# Altium PCB Leningrad_orig.PcbDoc (part 1 of 3)
Units mil, origin at the board's own origin, x right, y up, seen from the top; angles counter-clockwise.
Board outline 8070.87 x 4724.41 mil, 2 copper layers (Top Layer, Bottom Layer); 124 components, 165 nets, 1259 pads, 367 vias.
Unrouted connection lines stored in the file: 15.
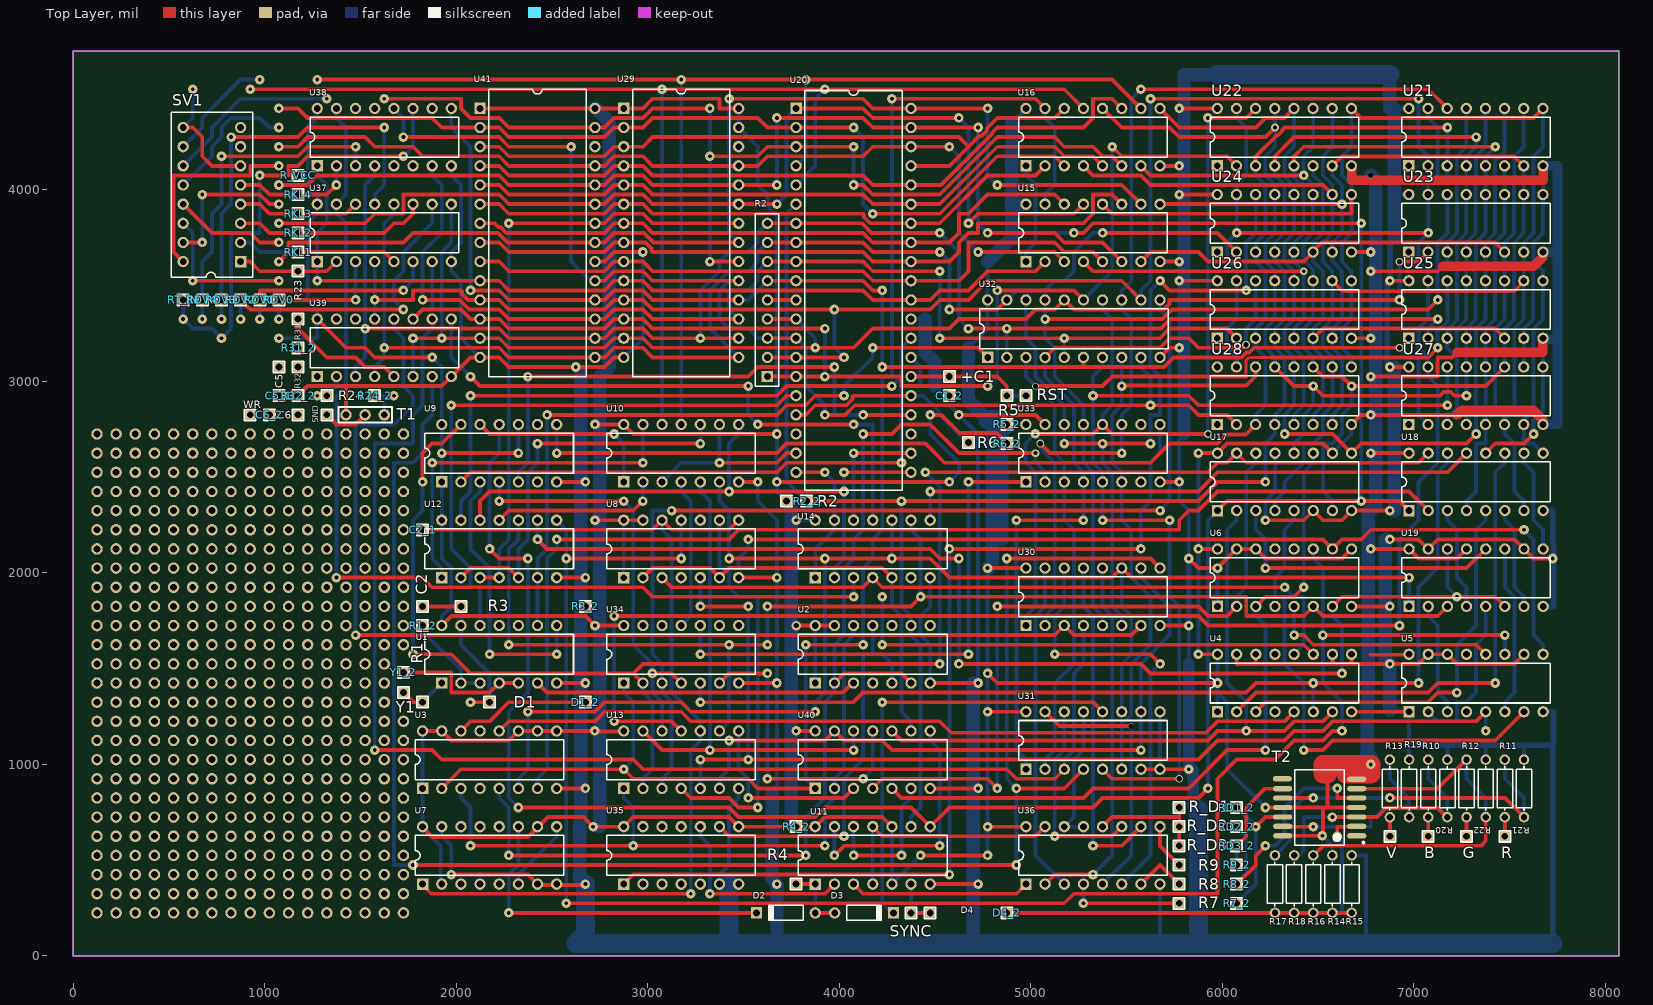
[diagram p0: Top Layer view]
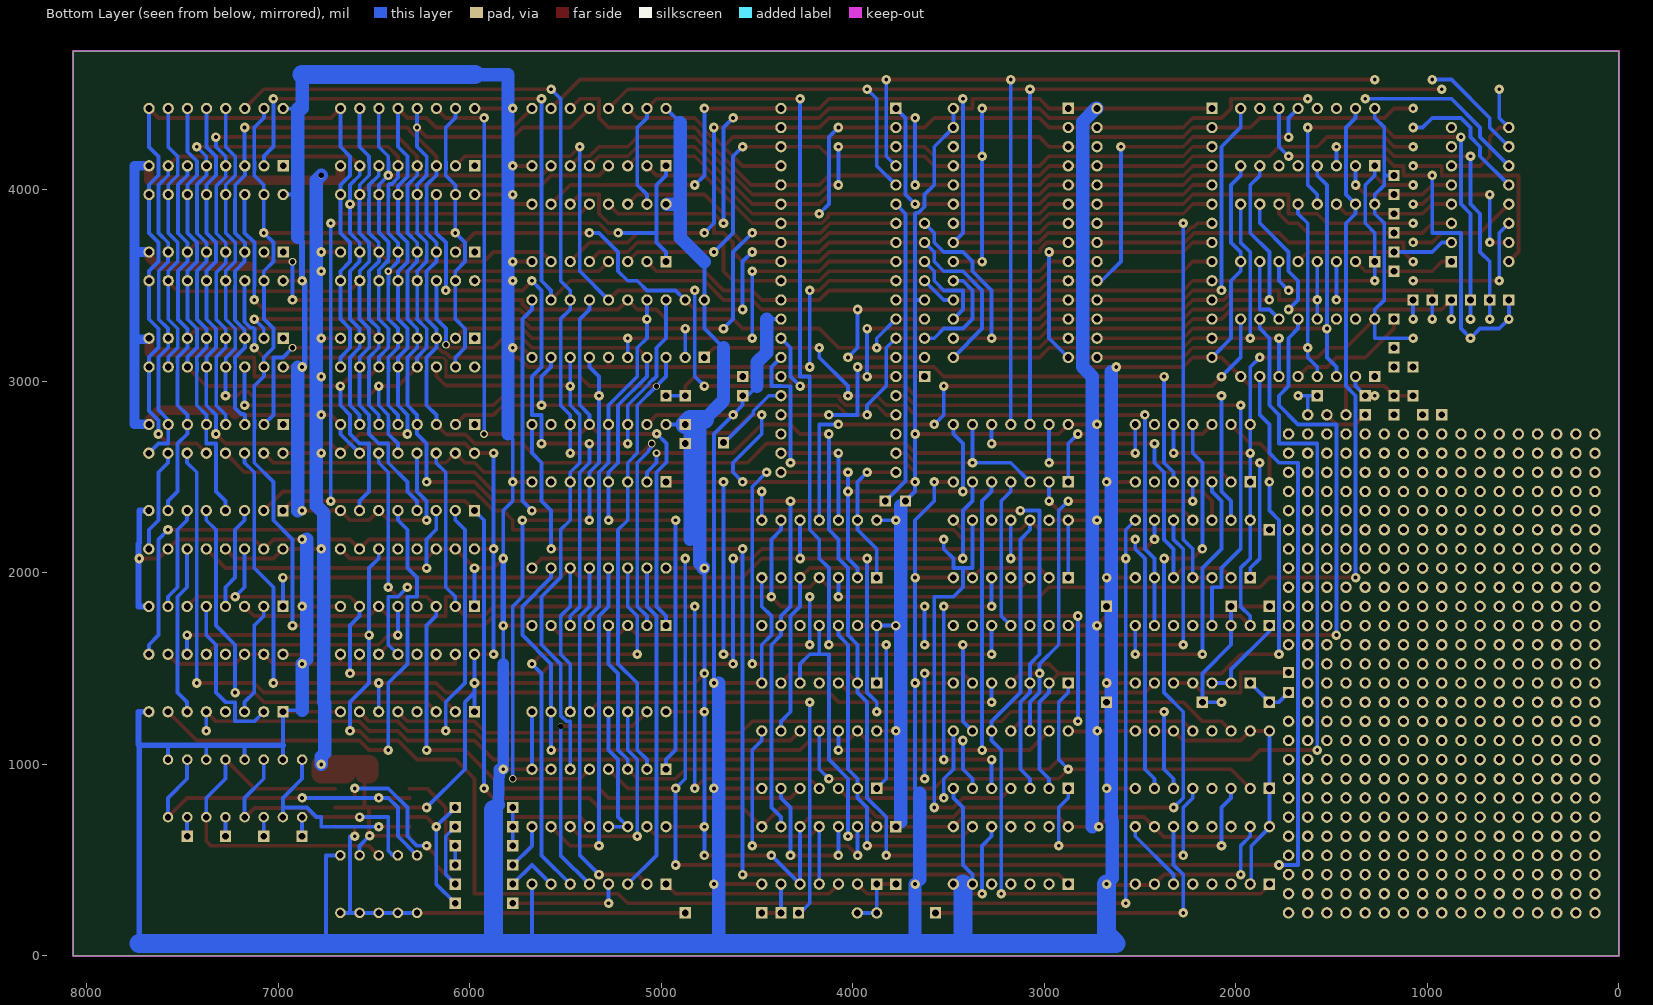
[diagram p1: Bottom Layer view, seen from below]

## Layer stack, top to bottom
Top Solder: solder mask 0.4, Solder Resist, Dk 3.5
Top Layer: signal copper 1.4
Dielectric 1: dielectric 12.6, FR-4, Dk 4.8
Bottom Layer: signal copper 1.4
Bottom Solder: solder mask 0.4, Solder Resist, Dk 3.5

## Board outline
0,0 8070.87,0 8070.87,4724.41 0,4724.41

## Design rules (kind name [scope] priority, off if disabled: settings)
Clearance [All] p1: gap=10 ignorepadtopadclearanceinfootprint=FALSE except(0: Arc-Hole Track-Hole SMDPad-Hole THPad-Hole Via-Hole Fill-Hole Poly-Hole Region-Hole Text-Hole)
PolygonConnect [All] p1: connectstyle=Relief reliefconductorwidth=10 reliefentries=4 polygonreliefangle="90 Angle" airgapwidth=10
RoutingVias [All] p1: holewidth=20 width=50 viastyle="Through Hole" minholewidth=20 minwidth=50 maxholewidth=20 maxwidth=50
SolderMaskExpansion [All] p1: expansion=4
Width Power_GND [InNet('GND')] p1: maxlimit=100 minlimit=20 preferedwidth=70 minimp=50.000000 maximp=50.000000 favimp=50.000000
Width Power_VCC [InNet('VCC')] p2: maxlimit=100 minlimit=20 preferedwidth=70 minimp=50.000000 maximp=50.000000 favimp=50.000000
Width Power_VDD [InNet('VDD')] p3: maxlimit=100 minlimit=20 preferedwidth=70 minimp=50.000000 maximp=50.000000 favimp=50.000000
Width [All] p4: maxlimit=20 minlimit=20 preferedwidth=20 minimp=50.000000 maximp=50.000000 favimp=50.000000
30 further rules are at their usual default settings.

## Components (designator, comment, footprint, x,y, rotation, side; value= is the part's Value field where it differs from the comment)
+C1 "" PIN1 4575,3025 r0 top locked (schematic designator C1_1)
B "" PIN1 7075,625 r90 top locked
C1_2 "" PIN1 4575,2925 r0 top locked
C2 "" PIN1 1825,1825 r0 top locked (schematic designator C2_2)
C2_1 "" PIN1 1825,2225 r0 top
C5 "" PIN1 1075,3075 r0 top locked (schematic designator C5_2)
C5_1 "" PIN1 1075,2925 r0 top locked
C6 "" PIN1 1175,2825 r0 top locked (schematic designator C6_1)
C6_2 "" PIN1 1025,2825 r0 top locked
D1 "" PIN1 2175,1325 r90 top locked (schematic designator D1_1)
D1_2 "" PIN1 2675,1325 r0 top locked
D2 "" DO-35A 3721.46,225 r180 top
D3 "" DO-35A 4130,225 r0 top
D4 "Socket" PIN1 4475,225 r180 top locked (schematic designator D4_1)
D4_2 "Socket" PIN1 4875,225 r90 top locked
G "" PIN1 7275,625 r90 top locked
R "" PIN1 7475,625 r90 top locked
R1 "" PIN1 1825,1325 r0 top (schematic designator R1_1)
R1_2 "" PIN1 1825,1725 r0 top
R2 "Res Pack8" LINE9 3625,3025 r180 top locked value=15K
R2 "" PIN1 3725,2375 r0 top locked (schematic designator R2_1)
R2_2 "" PIN1 3830,2375 r0 top locked
R3 "" PIN1 2025,1825 r0 top locked (schematic designator R3_1)
R3_2 "" PIN1 2675,1825 r0 top locked
R4 "" PIN1 3775,375 r0 top (schematic designator R4_1)
R4_2 "" PIN1 3775,675 r0 top
R5 "" PIN1 4875,2925 r0 top locked (schematic designator R5_1)
R5_2 "" PIN1 4875,2775 r0 top locked
R6 "" PIN1 4675,2680 r0 top locked (schematic designator R6_1)
R6_2 "" PIN1 4875,2675 r0 top locked
R7 "" PIN1 5775,275 r0 top locked (schematic designator R7_1)
R7_2 "" PIN1 6075,275 r0 top locked
R8 "" PIN1 5775,375 r0 top locked (schematic designator R8_1)
R8_2 "" PIN1 6075,375 r0 top locked
R9 "" PIN1 5775,475 r0 top locked (schematic designator R9_1)
R9_2 "" PIN1 6075,475 r0 top locked
R10 "" MLT 7075,875 r270 top locked value=75
R11 "" MLT 7475,875 r270 top locked value=75
R12 "" MLT 7275,875 r270 top locked value=75
R13 "" MLT 6875,875 r270 top locked value=75
R14 "" MLT 6575,375 r90 top locked value=750
R15 "" MLT 6675,375 r270 top locked value=1K
R16 "" MLT 6475,375 r270 top locked value=430
R17 "" MLT 6275,375 r270 top locked value=1K
R18 "" MLT 6375,375 r270 top locked value=2K
R19 "" MLT 6975,875 r270 top locked value=200
R20 "" MLT 7175,875 r270 top locked value=200
R21 "" MLT 7575,875 r270 top locked value=200
R22 "" MLT 7375,875 r270 top locked value=200
R23 "" PIN1 1175,3575 r0 top locked (schematic designator RKL0)
R24 "" PIN1 1325,2925 r90 top locked (schematic designator R24_1)
R24_2 "" PIN1 1575,2925 r90 top locked
R31 "" PIN1 1175,3325 r90 top locked (schematic designator R31_1)
R31_2 "" PIN1 1175,3175 r90 top locked
R32 "" PIN1 1175,3075 r90 top locked (schematic designator R32_1)
R32_2 "" PIN1 1175,2925 r90 top locked
R_D1 "" PIN1 5775,775 r90 top locked (schematic designator RD1_1)
R_D2 "" PIN1 5775,675 r90 top locked (schematic designator RD2_1)
R_D3 "" PIN1 5775,575 r90 top locked (schematic designator RD3_1)
R_VCC "" PIN1 1175,4075 r90 top locked
RD1_2 "" PIN1 6075,775 r90 top locked
RD2_2 "" PIN1 6075,675 r90 top locked
RD3_2 "" PIN1 6075,575 r90 top locked
RDV0 "" PIN1 1075,3425 r0 top locked
RDV1 "" PIN1 975,3425 r0 top locked
RDV2 "" PIN1 875,3425 r0 top locked
RDV3 "" PIN1 775,3425 r0 top locked
RDV4 "" PIN1 675,3425 r0 top locked
RKL1 "" PIN1 1175,3675 r0 top locked
RKL2 "" PIN1 1175,3775 r0 top locked
RKL3 "" PIN1 1175,3875 r0 top locked
RKL4 "" PIN1 1175,3975 r0 top locked
RST "" PIN1 4975,2925 r90 top locked (schematic designator RESET_BTN)
RT_IN "Socket" PIN1 575,3425 r90 top locked
SND "" PIN1 1325,2825 r0 top locked
SV1 "" DIP-16-KEY 875,3625 r90 top locked
SYNC "" PIN1 4375,225 r0 top locked
T1 "KT315" D35 1525,2825 r0 top locked
T2 "1HT251" CFP125P1450X730-14N 6508.35,775 r180 top locked
U1 "" N014 2225,1575 r0 top locked
U2 "" N014 4175,1575 r0 top locked
U3 "" N016 2175,1025 r0 top locked
U4 "" N016 6325,1425 r0 top locked
U5 "" N016 7325,1425 r0 top locked
U6 "" N016 6325,1975 r0 top locked
U7 "" 648-08 2175,525 r0 top locked
U8 "" N014 3175,2125 r0 top locked
U9 "" N014 2225,2625 r0 top locked
U10 "" N014 3175,2625 r0 top locked
U11 "" N014 4175,525 r0 top locked
U12 "" N014 2225,2125 r0 top locked
U13 "" N014 3175,1025 r0 top locked
U14 "" N014 4175,2125 r0 top locked
U15 "" N016 5325,3775 r0 top locked
U16 "" N016 5325,4275 r0 top locked
U17 "" N016 6325,2475 r0 top locked
U18 "" N016 7325,2475 r0 top locked
U19 "" N016 7325,1975 r0 top locked
U20 "" PDIP40 4075,3475 r270 top locked
U21 "MN41256A-08" DIP16 6975,4125 r90 top locked
U22 "MN41256A-08" DIP16 5975,4125 r90 top locked
U23 "MN41256A-08" DIP16 6975,3675 r90 top locked
U24 "MN41256A-08" DIP16 5975,3675 r90 top locked
U25 "MN41256A-08" DIP16 6975,3225 r90 top locked
U26 "MN41256A-08" DIP16 5975,3225 r90 top locked
U27 "MN41256A-08" DIP16 6975,2775 r90 top locked
U28 "MN41256A-08" DIP16 5975,2775 r90 top locked
U29 "" FDIP28W 3175,3775 r270 top locked
U30 "" N016D 5325,1875 r0 top locked
U31 "" N016D 5325,1125 r0 top locked
U32 "" N020 5225,3275 r0 top locked
U33 "" N016 5325,2625 r0 top locked
U34 "" N014 3175,1575 r0 top locked
U35 "" N014 3175,525 r0 top locked
U36 "" N016 5325,525 r0 top locked
U37 "" N016 1625,3775 r0 top locked
U38 "" N016 1625,4275 r0 top locked
U39 "" N016 1625,3175 r0 top locked
U40 "" N014 4175,1025 r0 top locked
U41 "" FDIP28W 2425,3775 r270 top locked
V "" PIN1 6875,625 r90 top locked (schematic designator VIDEO)
WR "" PIN1 925,2825 r0 top locked
Y1 "Socket" PIN1 1725,1375 r90 top (schematic designator Y1_1)
Y1_2 "Socket" PIN1 1725,1480 r90 top

## Footprints (in the part's own frame and the unit in brackets; to place one, negate y for a bottom-side part, rotate by r counter-clockwise, add the part's x,y. Pads: shape width x height; smd on the part's side, far side on the other; paste and mask are expansions set on the pad)
648-08 [mm] "DIP; 16 Leads; Row Spacing 7.62 mm; Pitch 2.54 mm"
  rect 1.5x1.5 hole 0.9: 1(-8.89,-3.81)
  round 1.5 hole 0.9: 2(-6.35,-3.81) 3(-3.81,-3.81) 4(-1.27,-3.81) 5(1.27,-3.81) 6(3.81,-3.81) 7(6.35,-3.81) 8(8.89,-3.81) 9(8.89,3.81) 10(6.35,3.81) 11(3.81,3.81) 12(1.27,3.81) 13(-1.27,3.81) 14(-3.81,3.81) 15(-6.35,3.81) 16(-8.89,3.81)
  silkscreen extent -9.85,-2.65 9.85,2.65
CFP125P1450X730-14N [mm] "CFP, 14-Leads, Body 10,00x6,50mm (max), Pitch 1,25mm, IPC Medium Density"
  oval 2.54x0.7 smd: 1(-4.911,3.75) 2(-4.911,2.5) 3(-4.911,1.25) 4(-4.911,0) 5(-4.911,-1.25) 6(-4.911,-2.5) 7(-4.911,-3.75) 8(4.953,-3.81) 9(4.911,-2.5) 10(4.911,-1.25) 11(4.911,0) 12(4.911,1.25) 13(4.911,2.5) 14(4.911,3.75)
  silkscreen extent -5.93,-5 3.27,5, body extent -3.25,-5 3.25,5, height 2.3
D35 [mil]
  round 60 hole 35.43: 1(-100,0) 2(0,0) 3(100,0)
  silkscreen extent -140,-40 140,40
DIP16 [mm]
  rect 1.5x1.5 hole 0.9: 1(0,0.03)
  round 1.5 hole 0.9: 2(0,-2.51) 3(0,-5.05) 4(0,-7.59) 5(0,-10.13) 6(0,-12.67) 7(0,-15.21) 8(0,-17.75) 9(7.62,-17.75) 10(7.62,-15.21) 11(7.62,-12.67) 12(7.62,-10.13) 13(7.62,-7.59) 14(7.62,-5.05) 15(7.62,-2.51) 16(7.62,0.03)
  silkscreen extent 1.16,-18.71 6.46,0.99
DIP-16-KEY [mm] "DIP; 16 Leads; Row Spacing 7.62 mm; Pitch 2.54 mm"
  rect 1.5x1.5 hole 0.9: 1(0,0)
  round 1.5 hole 0.9: 2(2.54,0) 3(5.08,0) 4(7.62,0) 5(10.16,0) 6(12.7,0) 7(15.24,0) 8(17.78,0) 9(17.78,7.62) 10(15.24,7.62) 11(12.7,7.62) 12(10.16,7.62) 13(7.62,7.62) 14(5.08,7.62) 15(2.54,7.62) 16(0,7.62)
  silkscreen extent -2.05,-1.59 19.83,9.2
DO-35A [mm] "Diode, Axial; Body 4.6 x 1.9 mm (LxDia. max), Lead Dia. 0.53 mm (max)"
  round 1.5 hole 0.9: 1(-3.9,0)
  rect 1.5x1.5 hole 0.9: 2(3.9,0)
  silkscreen extent -2.3,-1 2.4,1
FDIP28W [mm] "Ceramic Frit-seal DIP, Window; 28 Leads; Row Spacing 15.24 mm; Pitch 2.54 mm"
  rect 1.5x1.5 hole 0.9: 1(-16.51,-7.62)
  round 1.5 hole 0.9: 2(-13.97,-7.62) 3(-11.43,-7.62) 4(-8.89,-7.62) 5(-6.35,-7.62) 6(-3.81,-7.62) 7(-1.27,-7.62) 8(1.27,-7.62) 9(3.81,-7.62) 10(6.35,-7.62) 11(8.89,-7.62) 12(11.43,-7.62) 13(13.97,-7.62) 14(16.51,-7.62) 15(16.51,7.62) 16(13.97,7.62) 17(11.43,7.62) 18(8.89,7.62) 19(6.35,7.62) 20(3.81,7.62) 21(1.27,7.62) 22(-1.27,7.62) 23(-3.81,7.62) 24(-6.35,7.62) 25(-8.89,7.62) 26(-11.43,7.62) 27(-13.97,7.62) 28(-16.51,7.62)
  silkscreen extent -19.05,-6.45 19.05,6.45
LINE9 [mm]
  rect 1.5x1.5 hole 0.9: 1(0,0)
  round 1.5 hole 0.9: 2(0,-2.54) 3(0,-5.08) 4(0,-7.62) 5(0,-10.16) 6(0,-12.7) 7(0,-15.24) 8(0,-17.78) 9(0,-20.32)
  silkscreen extent -1.52,-21.59 1.59,1.27
MLT [mm] "Axial Device, Thru-Hole; 2 Leads; 0.4 in Pin Spacing"
  round 1.4 hole 0.85: 1(-3.81,0) 2(3.81,0)
  silkscreen extent -2.92,-1.02 2.92,1.02
N014 [mm] "DIP; 14 Leads; Row Spacing 7.62 mm; Pitch 2.54 mm"
  rect 1.5x1.5 hole 0.9: 1(-7.62,-3.81)
  round 1.5 hole 0.9: 2(-5.08,-3.81) 3(-2.54,-3.81) 4(0,-3.81) 5(2.54,-3.81) 6(5.08,-3.81) 7(7.62,-3.81) 8(7.62,3.81) 9(5.08,3.81) 10(2.54,3.81) 11(0,3.81) 12(-2.54,3.81) 13(-5.08,3.81) 14(-7.62,3.81)
  silkscreen extent -9.85,-2.65 9.85,2.65
N016 [mm] "DIP; 16 Leads; Row Spacing 7.62 mm; Pitch 2.54 mm"
  rect 1.5x1.5 hole 0.9: 1(-8.89,-3.81)
  round 1.5 hole 0.9: 2(-6.35,-3.81) 3(-3.81,-3.81) 4(-1.27,-3.81) 5(1.27,-3.81) 6(3.81,-3.81) 7(6.35,-3.81) 8(8.89,-3.81) 9(8.89,3.81) 10(6.35,3.81) 11(3.81,3.81) 12(1.27,3.81) 13(-1.27,3.81) 14(-3.81,3.81) 15(-6.35,3.81) 16(-8.89,3.81)
  silkscreen extent -9.85,-2.65 9.85,2.65
N016D [mm] "DIP; 16 Leads; Row Spacing 7.62 mm; Pitch 2.54 mm"
  rect 1.5x1.5 hole 0.9: 1(-8.89,-3.81)
  round 1.5 hole 0.9: 2(-6.35,-3.81) 3(-3.81,-3.81) 4(-1.27,-3.81) 5(1.27,-3.81) 6(3.81,-3.81) 7(6.35,-3.81) 8(8.89,-3.81) 9(8.89,3.81) 10(6.35,3.81) 11(3.81,3.81) 12(1.27,3.81) 13(-1.27,3.81) 14(-3.81,3.81) 15(-6.35,3.81) 16(-8.89,3.81)
  silkscreen extent -9.85,-2.65 9.85,2.65
N020 [mm] "DIP; 20 Leads; Row Spacing 7.62 mm; Pitch 2.54 mm"
  rect 1.5x1.5 hole 0.9: 1(-11.43,-3.81)
  round 1.5 hole 0.9: 2(-8.89,-3.81) 3(-6.35,-3.81) 4(-3.81,-3.81) 5(-1.27,-3.81) 6(1.27,-3.81) 7(3.81,-3.81) 8(6.35,-3.81) 9(8.89,-3.81) 10(11.43,-3.81) 11(11.43,3.81) 12(8.89,3.81) 13(6.35,3.81) 14(3.81,3.81) 15(1.27,3.81) 16(-1.27,3.81) 17(-3.81,3.81) 18(-6.35,3.81) 19(-8.89,3.81) 20(-11.43,3.81)
  silkscreen extent -12.5,-2.65 12.5,2.65
PDIP40 [mm] "DIP; 40 Leads; Row Spacing 15.24 mm; Pitch 2.54 mm"
  rect 1.5x1.5 hole 0.9: 1(-24.13,-7.62)
  round 1.5 hole 0.9: 2(-21.59,-7.62) 3(-19.05,-7.62) 4(-16.51,-7.62) 5(-13.97,-7.62) 6(-11.43,-7.62) 7(-8.89,-7.62) 8(-6.35,-7.62) 9(-3.81,-7.62) 10(-1.27,-7.62) 11(1.27,-7.62) 12(3.81,-7.62) 13(6.35,-7.62) 14(8.89,-7.62) 15(11.43,-7.62) 16(13.97,-7.62) 17(16.51,-7.62) 18(19.05,-7.62) 19(21.59,-7.62) 20(24.13,-7.62) 21(24.13,7.62) 22(21.59,7.62) 23(19.05,7.62) 24(16.51,7.62) 25(13.97,7.62) 26(11.43,7.62) 27(8.89,7.62) 28(6.35,7.62) 29(3.81,7.62) 30(1.27,7.62) 31(-1.27,7.62) 32(-3.81,7.62) 33(-6.35,7.62) 34(-8.89,7.62) 35(-11.43,7.62) 36(-13.97,7.62) 37(-16.51,7.62) 38(-19.05,7.62) 39(-21.59,7.62) 40(-24.13,7.62)
  silkscreen extent -26.5,-6.45 26.5,6.45
PIN1 [mm] "Connector; Plug"
  rect 1.5x1.5 hole 0.9: 1(0,0)
  silkscreen extent -0.76,-0.76 0.76,0.76

## Part data
+C1 B C1_2 C2 C2_1 C5 C5_1 C6 C6_2 D1 D1_2 G R R1 R1_2 R2 R2_2 R3 R3_2 R4 R4_2 R5 R5_2 R6 R6_2 R7 R7_2 R8 R8_2 R9 R9_2 R23 R24 R24_2 R31 R31_2 R32 R32_2 R_D1 R_D2 R_D3 R_VCC RD1_2 RD2_2 RD3_2 RDV0 RDV1 RDV2 RDV3 RDV4 RKL1 RKL2 RKL3 RKL4 RST SND SYNC V WR: library part Socket, "Socket", LatestRevisionDate=17-Jul-2002, LatestRevisionNote="Re-released for DXP Platform.", Publisher="Altium Limited"
D2 D3: library part "Diode 1N4149", "Computer Diode", Code_JEDEC=DO-204-AH, ComponentLink1Description="Manufacturer Link", ComponentLink1URL=http://www.national.com/, DatasheetVersion=1989, LatestRevisionDate=17-Jul-2002, LatestRevisionNote="Re-released for DXP Platform.", PackageDescription="Diode, Axial; Body 4.6 x 1.9 mm (LxDia. max), Lead Dia. 0.53 mm (max)", PackageReference=DO-35A, PackageVersion=1989, Published=8-Jun-2000, Publisher="Altium Limited"
R10 R11 R12 R13 R14 R15 R16 R17 R18 R19 R20 R21 R22: library part Res2, "Resistor", LatestRevisionDate=17-Jul-2002, LatestRevisionNote="Re-released for DXP Platform.", PackageDescription="Axial Device, Thru-Hole; 2 Leads; 0.4 in Pin Spacing", PackageReference=AXIAL-0.4, Published=8-Jun-2000, Publisher="Altium Limited"
SV1: library part SW-DIP8, "4009 Series DIP Switch, Raised actuator", ComponentLink1Description="Manufacturer Link", ComponentLink1URL=http://www.oupiin.com/prodindx.html#Headers, LatestRevisionDate=17-Dec-2003, LatestRevisionNote="PCB Footprint replaced.", PackageDescription="DIP; 16 Leads; Row Spacing 7.62 mm; Pitch 2.54 mm", PackageReference=DIP-16-KEY, Published=24-Mar-1999, Publisher="Altium Limited"
T1: "NPN General Purpose Amplifier", ComponentLink1Description="Manufacturer Link", ComponentLink1URL=http://www.fairchildsemi.com/, ComponentLink2Description=Datasheet, ComponentLink2URL=http://www.fairchildsemi.com/ds/2N%2F2N3904.pdf, DatasheetVersion=1997, LatestRevisionDate=15-Jan-2003, LatestRevisionNote="PCB Footprint 'BCY-W3/D4.7' replaced", PackageDescription="TO, Flat Index; 3 In-Line, Axial Leads; Body Dia. 4.5mm; Leads 0.51 x 0.48 mm (max)", PackageReference=TO-92A, PackageVersion=Sep-1998, Published=8-Jun-2000, Publisher="Altium Limited"
U1 U34: library part SN74HC04N, "Hex Inverter", ComponentLink1Description="Manufacturer Link", ComponentLink1URL=http://www.ti.com/, ComponentLink2Description=Datasheet, ComponentLink2URL=http://www-s.ti.com/sc/ds/sn74hc04.pdf, DatasheetVersion=May-1997, LatestRevisionDate=04-Mar-2005, LatestRevisionNote="Stylized 3D Model Added.", PackageDescription="DIP; 14 Leads; Row Spacing 7.62 mm; Pitch 2.54 mm", PackageReference=N014, PackageVersion=Oct-1995, Published=8-Jun-2000, Publisher="Altium Limited"
U2 U8 U9: library part SN74HC74N, "Dual D-Type Positive-Edge-Triggered Flip-Flop with Clear and Preset", ComponentLink1Description="Manufacturer Link", ComponentLink1URL=http://www.ti.com/, ComponentLink2Description=Datasheet, ComponentLink2URL=http://www-s.ti.com/sc/ds/sn74hc74.pdf, DatasheetVersion=May-1997, LatestRevisionDate=04-Mar-2005, LatestRevisionNote="Stylized 3D Model Added.", PackageDescription="DIP; 14 Leads; Row Spacing 7.62 mm; Pitch 2.54 mm", PackageReference=N014, PackageVersion=Oct-1995, Published=8-Jun-2000, Publisher="Altium Limited"
U3 U4 U5 U6: library part SN74HC193N, "4-Bit Synchronous Up/Down Counter (Dual Clock with Clear)", Code_JEDEC=MS-001-BB, ComponentLink1Description="Manufacturer Link", ComponentLink1URL=http://www.ti.com/, ComponentLink2Description=Datasheet, ComponentLink2URL=http://www-s.ti.com/sc/ds/sn74hc193.pdf, DatasheetVersion=May-1997, LatestRevisionDate=04-Mar-2005, LatestRevisionNote="Stylized 3D Model Added.", PackageDescription="DIP; 16 Leads; Row Spacing 7.62 mm; Pitch 2.54 mm", PackageReference=N016, PackageVersion=Oct-1995, Published=8-Jun-2000, Publisher="Altium Limited"
U7: library part MC14520BCP, "Dual Binary Up Counter", Code_JEDEC=MS-001-BB, ComponentLink1Description="Manufacturer Link", ComponentLink1URL=http://www.onsemi.com/, ComponentLink2Description=Datasheet, ComponentLink2URL=http://www.onsemi.com/pub/Collateral/MC14518B-D.PDF, DatasheetVersion=1995, PackageDescription="DIP; 16 Leads; Row Spacing 7.62 mm; Pitch 2.54 mm", PackageReference=648-08, PackageVersion=Apr-2000, Published=15-Apr-2002, Publisher="Altium Limited"
U10: library part SN74HC02N, "Quadruple 2-Input Positive-NOR Gate", ComponentLink1Description="Manufacturer Link", ComponentLink1URL=http://www.ti.com/, ComponentLink2Description=Datasheet, ComponentLink2URL=http://www-s.ti.com/sc/ds/sn74hc02.pdf, DatasheetVersion=May-1997, LatestRevisionDate=04-Mar-2005, LatestRevisionNote="Stylized 3D Model Added.", PackageDescription="DIP; 14 Leads; Row Spacing 7.62 mm; Pitch 2.54 mm", PackageReference=N014, PackageVersion=Oct-1995, Published=8-Jun-2000, Publisher="Altium Limited"
U11: library part SN74HC86N, "Quadruple 2-Input Exclusive-OR Gate", ComponentLink1Description="Manufacturer Link", ComponentLink1URL=http://www.ti.com/, ComponentLink2Description=Datasheet, ComponentLink2URL=http://www-s.ti.com/sc/ds/SN54HC86.pdf, DatasheetVersion=Aug-1999, LatestRevisionDate=04-Mar-2005, LatestRevisionNote="Stylized 3D Model Added.", PackageDescription="DIP; 14 Leads; Row Spacing 7.62 mm; Pitch 2.54 mm", PackageReference=N014, PackageVersion=Oct-1995, Published=8-Jun-2000, Publisher="Altium Limited"
U12: library part SN74HC00N, "Quadruple 2-Input Positive-NAND Gate", ComponentLink1Description="Manufacturer Link", ComponentLink1URL=http://www.ti.com/, ComponentLink2Description=Datasheet, ComponentLink2URL=http://www-s.ti.com/sc/ds/sn74hc00.pdf, DatasheetVersion=May-1997, LatestRevisionDate=04-Mar-2005, LatestRevisionNote="Stylized 3D Model Added.", PackageDescription="DIP; 14 Leads; Row Spacing 7.62 mm; Pitch 2.54 mm", PackageReference=N014, PackageVersion=Oct-1995, Published=8-Jun-2000, Publisher="Altium Limited"
U13: library part SN74HC08N, "Quadruple 2-Input Positive-AND Gate", ComponentLink1Description="Manufacturer Link", ComponentLink1URL=http://www.ti.com/, ComponentLink2Description=Datasheet, ComponentLink2URL=http://www-s.ti.com/sc/ds/SN74HC08.pdf, DatasheetVersion=May-1997, LatestRevisionDate=04-Mar-2005, LatestRevisionNote="Stylized 3D Model Added.", PackageDescription="DIP; 14 Leads; Row Spacing 7.62 mm; Pitch 2.54 mm", PackageReference=N014, PackageVersion=Oct-1995, Published=8-Jun-2000, Publisher="Altium Limited"
U14: library part SN74HC32N, "Quadruple 2-Input Positive-OR Gate", ComponentLink1Description="Manufacturer Link", ComponentLink1URL=http://www.ti.com/, ComponentLink2Description=Datasheet, ComponentLink2URL=http://www-s.ti.com/sc/ds/sn74hc32.pdf, DatasheetVersion=May-1997, LatestRevisionDate=04-Mar-2005, LatestRevisionNote="Stylized 3D Model Added.", PackageDescription="DIP; 14 Leads; Row Spacing 7.62 mm; Pitch 2.54 mm", PackageReference=N014, PackageVersion=Oct-1995, Published=8-Jun-2000, Publisher="Altium Limited"
U15 U16 U17 U18 U19 U36 U37 U38: library part SN74HC257N, "Quadruple 2-Line to 1-Line Data Selector/Multiplexer with 3-State Outputs", Code_JEDEC=MS-001-BB, ComponentLink1Description="Manufacturer Link", ComponentLink1URL=http://www.ti.com/, ComponentLink2Description=Datasheet, ComponentLink2URL=http://www-s.ti.com/sc/ds/sn74hc257.pdf, DatasheetVersion=Jun-1989, LatestRevisionDate=04-Mar-2005, LatestRevisionNote="Stylized 3D Model Added.", PackageDescription="DIP; 16 Leads; Row Spacing 7.62 mm; Pitch 2.54 mm", PackageReference=N016, PackageVersion=Oct-1995, Published=8-Jun-2000, Publisher="Altium Limited"
U20: library part Z84C0010PEC, "CMOS 8-Bit Microprocessor", ComponentLink1Description="Manufacturer Link", ComponentLink1URL=http://www.zilog.com/, ComponentLink2Description=Datasheet, ComponentLink2URL=http://www.zilog.com/docs/z80/um0081.pdf, DatasheetVersion=Jan-1989, LatestRevisionDate=04-Mar-2005, LatestRevisionNote="Stylized 3D Model Added.", PackageDescription="DIP; 40 Leads; Row Spacing 15.24 mm; Pitch 2.54 mm", PackageReference=PDIP40, PackageVersion=Jun-1999, Published=15-Apr-2002, Publisher="Altium Limited"
U29 U41: library part M27C512-90XF6, "512 Kbit (64Kb x 8) UV EPROM and OTP EPROM", ComponentLink1Description="Manufacturer Link", ComponentLink1URL=http://www.st.com/, ComponentLink2Description=Datasheet, ComponentLink2URL=http://www.st.com/stonline/products/literature/ds/2387/m27c512.pdf, DatasheetVersion=Nov-1998, LatestRevisionDate=06-Jun-2005, LatestRevisionNote="Stylized 3D Model Added.", PackageDescription="Ceramic Frit-seal DIP, Window; 28 Leads; Row Spacing 15.24 mm; Pitch 2.54 mm", PackageReference=FDIP28W, Published=24-Aug-2001, Publisher="Altium Limited"
U30 U31: library part SN74HC298N, "Quadruple 2-Input Multiplexer with Storage", Code_JEDEC=MS-001-BB, ComponentLink1Description="Manufacturer Link", ComponentLink1URL=http://www.ti.com/, DatasheetVersion=Jun-1989, LatestRevisionDate=04-Mar-2005, LatestRevisionNote="Stylized 3D Model Added.", PackageDescription="DIP; 16 Leads; Row Spacing 7.62 mm; Pitch 2.54 mm", PackageReference=N016D, PackageVersion=Oct-1995, Published=8-Jun-2000, Publisher="Altium Limited"
U32: library part SN74HC373N, "Octal Transparent D-Type Latches with 3-State Outputs", ComponentLink1Description="Manufacturer Link", ComponentLink1URL=http://www.ti.com/, ComponentLink2Description=Datasheet, ComponentLink2URL=http://www-s.ti.com/sc/ds/sn54hc373.pdf, DatasheetVersion=May-1997, LatestRevisionDate=04-Mar-2005, LatestRevisionNote="Stylized 3D Model Added.", PackageDescription="DIP; 20 Leads; Row Spacing 7.62 mm; Pitch 2.54 mm", PackageReference=N020, PackageVersion=Oct-1995, Published=8-Jun-2000, Publisher="Altium Limited"
U33: library part SN74HC165N, "8-Bit Parallel-Load Shift Register", Code_JEDEC=MS-001-BB, ComponentLink1Description="Manufacturer Link", ComponentLink1URL=http://www.ti.com/, ComponentLink2Description=Datasheet, ComponentLink2URL=http://www-s.ti.com/sc/ds/sn74hc165.pdf, DatasheetVersion=May-1997, LatestRevisionDate=04-Mar-2005, LatestRevisionNote="Stylized 3D Model Added.", PackageDescription="DIP; 16 Leads; Row Spacing 7.62 mm; Pitch 2.54 mm", PackageReference=N016, PackageVersion=Oct-1995, Published=8-Jun-2000, Publisher="Altium Limited"
U35: library part SN74LS95BN, "4-Bit Parallel-Access Shift Register", ComponentAvailability=Obsolete, ComponentLink1Description="Manufacturer Link", ComponentLink1URL=http://www.ti.com/, ComponentLink2Description=Datasheet, ComponentLink2URL=http://www-s.ti.com/sc/ds/sn5495a.pdf, DatasheetVersion=Mar-1988, LatestRevisionDate=04-Mar-2005, LatestRevisionNote="Stylized 3D Model Added.", PackageDescription="DIP; 14 Leads; Row Spacing 7.62 mm; Pitch 2.54 mm", PackageReference=N014, PackageVersion=Oct-1995, Published=8-Jun-2000, Publisher="Altium Limited"
U39: library part SN74HC174N, "Hex D-Type Flip-Flop with Clear", Code_JEDEC=MS-001-BB, ComponentLink1Description="Manufacturer Link", ComponentLink1URL=http://www.ti.com/, ComponentLink2Description=Datasheet, ComponentLink2URL=http://www-s.ti.com/sc/ds/sn74hc174.pdf, DatasheetVersion=May-1997, LatestRevisionDate=04-Mar-2005, LatestRevisionNote="Stylized 3D Model Added.", PackageDescription="DIP; 16 Leads; Row Spacing 7.62 mm; Pitch 2.54 mm", PackageReference=N016, PackageVersion=Oct-1995, Published=8-Jun-2000, Publisher="Altium Limited"
U40: library part SN74HC10N, "Triple 3-Input Positive-NAND Gate", ComponentLink1Description="Manufacturer Link", ComponentLink1URL=http://www.ti.com/, ComponentLink2Description=Datasheet, ComponentLink2URL=http://www-s.ti.com/sc/ds/sn74hc10.pdf, DatasheetVersion=May-1997, LatestRevisionDate=04-Mar-2005, LatestRevisionNote="Stylized 3D Model Added.", PackageDescription="DIP; 14 Leads; Row Spacing 7.62 mm; Pitch 2.54 mm", PackageReference=N014, PackageVersion=Oct-1995, Published=8-Jun-2000, Publisher="Altium Limited"
D4 D4_2 RT_IN Y1 Y1_2: LatestRevisionDate=17-Jul-2002, LatestRevisionNote="Re-released for DXP Platform.", Publisher="Altium Limited"

## Free pads (board coordinates)
  round 60 hole 35.43: 1(125,225) 1(125,325) 1(125,425) 1(125,525) 1(125,625) 1(125,725) 1(125,825) 1(125,925) 1(125,1025) 1(125,1125) 1(125,1225) 1(125,1325) 1(125,1425) 1(125,1525) 1(125,1625) 1(125,1725) 1(125,1825) 1(125,1925) 1(125,2025) 1(125,2125) 1(125,2225) 1(125,2325) 1(125,2425) 1(125,2525) 1(125,2625) 1(125,2725) 2(225,225) 2(225,325) 2(225,425) 2(225,525) 2(225,625) 2(225,725) 2(225,825) 2(225,925) 2(225,1025) 2(225,1125) 2(225,1225) 2(225,1325) 2(225,1425) 2(225,1525) 2(225,1625) 2(225,1725) 2(225,1825) 2(225,1925) 2(225,2025) 2(225,2125) 2(225,2225) 2(225,2325) 2(225,2425) 2(225,2525) 2(225,2625) 2(225,2725) 3(325,225) 3(325,325) 3(325,425) 3(325,525) 3(325,625) 3(325,725) 3(325,825) 3(325,925) 3(325,1025) 3(325,1125) 3(325,1225) 3(325,1325) 3(325,1425) 3(325,1525) 3(325,1625) 3(325,1725) 3(325,1825) 3(325,1925) 3(325,2025) 3(325,2125) 3(325,2225) 3(325,2325) 3(325,2425) 3(325,2525) 3(325,2625) 3(325,2725) 4(425,225) 4(425,325) 4(425,425) 4(425,525) 4(425,625) 4(425,725) 4(425,825) 4(425,925) 4(425,1025) 4(425,1125) 4(425,1225) 4(425,1325) 4(425,1425) 4(425,1525) 4(425,1625) 4(425,1725) 4(425,1825) 4(425,1925) 4(425,2025) 4(425,2125) 4(425,2225) 4(425,2325) 4(425,2425) 4(425,2525) 4(425,2625) 4(425,2725) 5(525,225) 5(525,325) 5(525,425) 5(525,525) 5(525,625) 5(525,725) 5(525,825) 5(525,925) 5(525,1025) 5(525,1125) 5(525,1225) 5(525,1325) 5(525,1425) 5(525,1525) 5(525,1625) 5(525,1725) 5(525,1825) 5(525,1925) 5(525,2025) 5(525,2125) 5(525,2225) 5(525,2325) 5(525,2425) 5(525,2525) 5(525,2625) 5(525,2725) 6(625,225) 6(625,325) 6(625,425) 6(625,525) 6(625,625) 6(625,725) 6(625,825) 6(625,925) 6(625,1025) 6(625,1125) 6(625,1225) 6(625,1325) 6(625,1425) 6(625,1525) 6(625,1625) 6(625,1725) 6(625,1825) 6(625,1925) 6(625,2025) 6(625,2125) 6(625,2225) 6(625,2325) 6(625,2425) 6(625,2525) 6(625,2625) 6(625,2725) 7(725,225) 7(725,325) 7(725,425) 7(725,525) 7(725,625) 7(725,725) 7(725,825) 7(725,925) 7(725,1025) 7(725,1125) 7(725,1225) 7(725,1325) 7(725,1425) 7(725,1525) 7(725,1625) 7(725,1725) 7(725,1825) 7(725,1925) 7(725,2025) 7(725,2125) 7(725,2225) 7(725,2325) 7(725,2425) 7(725,2525) 7(725,2625) 7(725,2725) 8(825,225) 8(825,325) 8(825,425) 8(825,525) 8(825,625) 8(825,725) 8(825,825) 8(825,925) 8(825,1025) 8(825,1125) 8(825,1225) 8(825,1325) 8(825,1425) 8(825,1525) 8(825,1625) 8(825,1725) 8(825,1825) 8(825,1925) 8(825,2025) 8(825,2125) 8(825,2225) 8(825,2325) 8(825,2425) 8(825,2525) 8(825,2625) 8(825,2725) 9(925,225) 9(925,325) 9(925,425) 9(925,525) 9(925,625) 9(925,725) 9(925,825) 9(925,925) 9(925,1025) 9(925,1125) 9(925,1225) 9(925,1325) 9(925,1425) 9(925,1525) 9(925,1625) 9(925,1725) 9(925,1825) 9(925,1925) 9(925,2025) 9(925,2125) 9(925,2225) 9(925,2325) 9(925,2425) 9(925,2525) 9(925,2625) 9(925,2725) 10(1025,225) 10(1025,325) 10(1025,425) 10(1025,525) 10(1025,625) 10(1025,725) 10(1025,825) 10(1025,925) 10(1025,1025) 10(1025,1125) 10(1025,1225) 10(1025,1325) 10(1025,1425) 10(1025,1525) 10(1025,1625) 10(1025,1725) 10(1025,1825) 10(1025,1925) 10(1025,2025) 10(1025,2125) 10(1025,2225) 10(1025,2325) 10(1025,2425) 10(1025,2525) 10(1025,2625) 10(1025,2725) 11(1125,225) 11(1125,325) 11(1125,425) 11(1125,525) 11(1125,625) 11(1125,725) 11(1125,825) 11(1125,925) 11(1125,1025) 11(1125,1125) 11(1125,1225) 11(1125,1325) 11(1125,1425) 11(1125,1525) 11(1125,1625) 11(1125,1725) 11(1125,1825) 11(1125,1925) 11(1125,2025) 11(1125,2125) 11(1125,2225) 11(1125,2325) 11(1125,2425) 11(1125,2525) 11(1125,2625) 11(1125,2725) 12(1225,225) 12(1225,325) 12(1225,425) 12(1225,525) 12(1225,625) 12(1225,725) 12(1225,825) 12(1225,925) 12(1225,1025) 12(1225,1125) 12(1225,1225) 12(1225,1325) 12(1225,1425) 12(1225,1525) 12(1225,1625) 12(1225,1725) 12(1225,1825) 12(1225,1925) 12(1225,2025) 12(1225,2125) 12(1225,2225) 12(1225,2325) 12(1225,2425) 12(1225,2525) 12(1225,2625) 12(1225,2725) 13(1325,225) 13(1325,325) 13(1325,425) 13(1325,525) 13(1325,625) 13(1325,725) 13(1325,825) 13(1325,925) 13(1325,1025) 13(1325,1125) 13(1325,1225) 13(1325,1325) 13(1325,1425) 13(1325,1525) 13(1325,1625) 13(1325,1725) 13(1325,1825) 13(1325,1925) 13(1325,2025) 13(1325,2125) 13(1325,2225) 13(1325,2325) 13(1325,2425) 13(1325,2525) 13(1325,2625) 13(1325,2725) 14(1425,225) 14(1425,325) 14(1425,425) 14(1425,525) 14(1425,625) 14(1425,725) 14(1425,825) 14(1425,925) 14(1425,1025) 14(1425,1125) 14(1425,1225) 14(1425,1325) 14(1425,1425) 14(1425,1525) 14(1425,1625) 14(1425,1725) 14(1425,1825) 14(1425,1925) 14(1425,2025) 14(1425,2125) 14(1425,2225) 14(1425,2325) 14(1425,2425) 14(1425,2525) 14(1425,2625) 14(1425,2725) 15(1525,225) 15(1525,325) 15(1525,425) 15(1525,525) 15(1525,625) 15(1525,725) 15(1525,825) 15(1525,925) 15(1525,1025) 15(1525,1125) 15(1525,1225) 15(1525,1325) 15(1525,1425) 15(1525,1525) 15(1525,1625) 15(1525,1725) 15(1525,1825) 15(1525,1925) 15(1525,2025) 15(1525,2125) 15(1525,2225) 15(1525,2325) 15(1525,2425) 15(1525,2525) 15(1525,2625) 15(1525,2725) 16(1625,225) 16(1625,325) 16(1625,425) 16(1625,525) 16(1625,625) 16(1625,725) 16(1625,825) 16(1625,925) 16(1625,1025) 16(1625,1125) 16(1625,1225) 16(1625,1325) 16(1625,1425) 16(1625,1525) 16(1625,1625) 16(1625,1725) 16(1625,1825) 16(1625,1925) 16(1625,2025) 16(1625,2125) 16(1625,2225) 16(1625,2325) 16(1625,2425) 16(1625,2525) 16(1625,2625) 16(1625,2725) 16(1725,2225) 17(1725,225) 17(1725,325) 17(1725,425) 17(1725,525) 17(1725,625) 17(1725,725) 17(1725,825) 17(1725,925) 17(1725,1025) 17(1725,1125) 17(1725,1225) 17(1725,1625) 17(1725,1725) 17(1725,1825) 17(1725,1925) 17(1725,2025) 17(1725,2125) 17(1725,2325) 17(1725,2425) 17(1725,2525) 17(1725,2625) 17(1725,2725)

## Via types
v1: diameter 50, hole 20, Top Layer to Bottom Layer, 354 vias
v2: diameter 40, hole 28, Top Layer to Bottom Layer, 6 vias
v3: diameter 40, hole 20, Top Layer to Bottom Layer, 3 vias
v4: diameter 30, hole 28, Top Layer to Bottom Layer, 2 vias
v5: diameter 50, hole 28, Top Layer to Bottom Layer, 1 vias
v6: diameter 35, hole 28, Top Layer to Bottom Layer, 1 vias

## Nets (pads, with @x,y where several pads share a name; then routed paths per layer and width w, separated by ;. In a path a pad name is that pad's centre, name@x,y a point inside that pad or via, vN(x,y) a via of type N, cw(c..) or ccw(c..) an arc to the next point about the centre after c; other vN are vias at no path point)
A0: U15.2 U20.30 U29.10 U37.1 U38.1 U41.10 | length 4607.1
  Top Layer w20: v1(1275,3525) U41.10@2125,3525 2225,3525 2275,3475 2775,3475 2825,3525 U29.10@2875,3525 2975,3525 3025,3475 4125,3475 4175,3425 U20.30@4375,3425 4475,3425 4525,3475 4675,3475 4775,3575 5025,3575 U15.2@5075,3625
  Bottom Layer w20: v1(1275,3525) U37.1@1275,3625 1275,3775 1325,3825 1325,4025 1275,4075 U38.1@1275,4125
A1: U15.5 U20.31 U29.9 U41.9 | length 3545
  Top Layer w20: U41.9@2125,3625 2225,3625 2275,3575 2775,3575 2825,3625 U29.9@2875,3625 2975,3625 3025,3575 4125,3575 4175,3525 U20.31@4375,3525 4625,3525 4675,3575 4675,3725 5125,3725 5175,3675 5325,3675 U15.5@5375,3625
A2: U15.11 U20.32 U29.8 U41.8 | length 3723.7
  Top Layer w20: U41.8@2125,3725 2225,3725 2275,3675 2775,3675 2825,3725 U29.8@2875,3725 2988.64,3725 3020,3693.64 3020,3680 3025,3675 4125,3675 4175,3625 U20.32@4375,3625 4575,3625 4625,3675 4625,3725 4675,3775 4725,3775 4725,3825 5275,3825 5325,3875 5325,3975 5425,3975 U15.11@5475,3925
A3: U15.14 U20.33 U29.7 U41.7 | length 3315.7
  Top Layer w20: U41.7@2125,3825 2200,3825 2220,3805 2231.36,3805 2261.36,3775 2775,3775 2825,3825 U29.7@2875,3825 2975,3825 3025,3775 4125,3775 4175,3725 U20.33@4375,3725 4575,3725 4625,3775 4625,3875 4675,3875 4775,3975 5125,3975 U15.14@5175,3925
A4: U16.2 U20.34 U29.6 U41.6 | length 3165.1
  Top Layer w20: U41.6@2125,3925 2225,3925 2275,3875 2775,3875 2825,3925 U29.6@2875,3925 2975,3925 3025,3875 4125,3875 4130,3870 4130,3856.36 4161.36,3825 U20.34@4375,3825 4525,3825 4775,4075 5025,4075 U16.2@5075,4125
A5: U16.5 U20.35 U29.5 U41.5 | length 3498.5
  Top Layer w20: U41.5@2125,4025 2225,4025 2275,3975 2775,3975 2825,4025 U29.5@2875,4025 2975,4025 3025,3975 4125,3975 4175,3925 U20.35@4375,3925 4525,3925 4825,4225 5125,4225 5175,4175 5325,4175 U16.5@5375,4125
A6: U16.11 U20.36 U29.4 U41.4 | length 3702.1
  Top Layer w20: U41.4@2125,4125 2225,4125 2275,4075 2775,4075 2825,4125 U29.4@2875,4125 2975,4125 3025,4075 4125,4075 4175,4025 U20.36@4375,4025 4531.07,4025 4800,4293.93 4800,4300 4825,4325 5275,4325 5325,4375 5325,4475 5425,4475 U16.11@5475,4425
A7: U16.14 U20.37 U29.3 U41.3 | length 3565.1
  Top Layer w20: U41.3@2125,4225 2225,4225 2275,4175 2775,4175 2825,4225 U29.3@2875,4225 2975,4225 3025,4275 4625,4275 4675,4225 ; U20.37@4375,4125 4575,4125 4675,4225 ; U16.14@5175,4425 5125,4375 4825,4375 4770,4320 4770,4306.36 4743.64,4280 4730,4280 4675,4225
A8: SV1.16 U15.3 U20.38 U29.25 U41.25 | length 5819.2
  Top Layer w20: SV1.16@575,3625 525,3675 525,4075 925,4075 925,4125 v1(1075,4125) ; v1(1075,4225) 1175,4225 1225,4275 1525,4275 1575,4225 1775,4225 1825,4175 2225,4175 2275,4125 U41.25@2725,4125 2775,4125 2825,4175 2975,4175 3025,4125 U29.25@3475,4125 3575,4125 3625,4175 4125,4175 4175,4225 U20.38@4375,4225 v1(4575,4225) ; v1(4725,3675) 5125,3675 U15.3@5175,3625
  Bottom Layer w20: v1(4575,4225) 4625,4175 4625,3775 v1(4725,3675)
A9: SV1.15 U15.6 U20.39 U29.24 U41.24 | length 6207.1
  Top Layer w20: SV1.15@575,3725 v1(675,3725) ; v1(675,3975) 975,3975 1025,3925 v1(1075,3925) ; v1(1075,4025) 1225,4025 1275,4075 2225,4075 2275,4025 U41.24@2725,4025 2775,4025 2825,4075 2975,4075 3025,4025 U29.24@3475,4025 v1(3675,4025) ; v1(3675,4375) 4125,4375 4175,4325 U20.39@4375,4325 v1(4725,4325) ; v1(4775,3775) 5125,3775 5175,3725 5375,3725 U15.6@5475,3625
  Bottom Layer w20: v1(675,3725) v1(675,3975) ; v1(3675,4025) v1(3675,4375) ; v1(4725,4325) 4725,3825 v1(4775,3775)
A10: SV1.14 U15.10 U20.40 U29.21 U41.21 | length 6677.8
  Top Layer w20: v1(625,3525) v1(1075,3525) ; v1(1075,3625) 1125,3675 1125,3725 1725,3725 1775,3775 2218.93,3775 2268.93,3725 U41.21@2725,3725 2775,3725 2825,3775 2981.07,3775 3031.07,3725 U29.21@3475,3725 ; v1(3425,4475) 4125,4475 4175,4425 U20.40@4375,4425 v1(4775,4425) ; v1(4825,4025) 5475,4025 U15.10@5575,3925
  Bottom Layer w20: SV1.14@575,3825 625,3775 v1(625,3525) ; v1(3425,4475) 3425,3775 U29.21@3475,3725 ; v1(4775,4425) 4775,4075 v1(4825,4025)
A11: SV1.13 U15.13 U20.1 U29.23 U41.23 | length 5990
  Top Layer w20: SV1.13@575,3925 725,3775 925,3775 975,3725 v1(1075,3725) ; v1(1075,3825) 1525,3825 1575,3875 1725,3875 1725,3975 2225,3975 2275,3925 U41.23@2725,3925 2775,3925 2825,3975 2975,3975 3025,3925 U29.23@3475,3925 v1(3675,3925) ; U20.1@3775,4425 4125,4425 4175,4375 v1(4625,4375) ; v1(4675,3825) 4725,3875 5225,3875 U15.13@5275,3925
  Bottom Layer w20: v1(3675,3925) 3725,3975 3725,4375 U20.1@3775,4425 ; v1(4625,4375) 4675,4325 v1(4675,3825)
A12: SV1.12 U16.3 U20.2 U29.2 U41.2 | length 5484.9
  Top Layer w20: v1(1075,4425) 1175,4425 1225,4375 1875,4375 1925,4325 U41.2@2125,4325 2225,4325 2275,4275 2775,4275 2825,4325 U29.2@2875,4325 2975,4325 3025,4375 3575,4375 3625,4325 U20.2@3775,4325 v1(4075,4325) ; v1(4175,3875) 4525,3875 4825,4175 5125,4175 U16.3@5175,4125
  Bottom Layer w20: SV1.12@575,4025 725,4175 725,4225 775,4275 775,4325 825,4375 975,4375 1025,4325 v1(1075,4325) ; v1(4075,4325) 4125,4275 4125,3925 v1(4175,3875)
A13: SV1.11 U16.6 U20.3 U29.20 U41.27 | length 6284.9
  Top Layer w20: v1(1625,4475) 2025,4475 2025,4425 2075,4375 2225,4375 2275,4325 U41.27@2725,4325 2775,4325 2825,4375 2975,4375 3025,4425 v1(3325,4425) ; v1(3325,3625) U29.20@3475,3625 ; v1(3325,4175) 3575,4175 3625,4225 U20.3@3775,4225 v1(4075,4225) ; v1(4075,4025) 4125,4025 4175,3975 4525,3975 4825,4275 5125,4275 5175,4225 5325,4225 5375,4175 5425,4175 U16.6@5475,4125
  Bottom Layer w20: SV1.11@575,4125 725,4275 725,4325 875,4475 v1(1325,4475) ; v1(3325,3625) v1(3325,4175) v1(3325,4425) ; v1(4075,4025) v1(4075,4225)
A14: SV1.10 U10.11 U16.10 U20.4 | length 7207.1
  Top Layer w20: v1(1275,4575) v1(3175,4575) v1(3825,4575) 5425,4575 U16.10@5575,4425
  Bottom Layer w20: SV1.10@575,4225 675,4325 675,4375 875,4575 v1(975,4575) ; U10.11@3175,2775 v1(3175,4575) ; U20.4@3775,4125 3825,4175 v1(3825,4575)
A15: SV1.6 SV1.9 U10.12 U16.13 U20.5 | length 7365.7
  Top Layer w20: SV1.9@575,4325 625,4325 675,4275 675,4175 725,4125 SV1.6@875,4125 ; v1(925,4525) v1(3075,4525) v1(3925,4525) 5175,4525 U16.13@5275,4425
  Bottom Layer w20: SV1.9@575,4325 625,4375 v1(625,4525) ; U10.12@3075,2775 v1(3075,4525) ; U20.5@3775,4025 3875,4125 3875,4475 v1(3925,4525)
B\K\: U5.9 U6.10 U8.9 U13.4 | length 7136.4
  Top Layer w20: U13.4@3175,875 3225,825 3425,825 3475,775 v1(3575,775) ; v1(3525,2175) 6525,2175 U6.10@6575,2125 6625,2175 6725,2175 6775,2225 v1(7575,2225)
  Bottom Layer w20: U8.9@3375,2275 3375,2025 3425,2025 ; v1(3525,2175) 3525,2125 3475,2075 3475,2025 3425,2025 ; v1(3575,775) 3575,1875 3475,1875 3425,1925 3425,2025 ; v1(7575,2225) 7625,2175 7625,1675 7675,1625 U5.9@7675,1575
B\O\R\D\E\R\: U13.6 U30.10 U31.10 U40.13 | length 3557.1
  Top Layer w20: v1(3425,1125) 3925,1125 U40.13@3975,1175 4025,1125 4225,1125 4275,1075 v1(5575,1075)
  Bottom Layer w20: U13.6@3375,875 3375,925 3425,975 v1(3425,1125) ; v1(5575,1075) U31.10@5575,1275 5575,1525 5725,1675 5725,1825 5575,1975 U30.10@5575,2025
B\S\: U5.5 U8.5 U13.5 | length 5653.6
  Top Layer w20: v1(3275,1025) v1(3525,1025) 5875,1025 5975,1125 6325,1125 6375,1175 6525,1175 6575,1225 7325,1225 U5.5@7375,1275 ; v1(3275,1825) v1(3525,1825)
  Bottom Layer w20: U13.5@3275,875 v1(3275,1025) ; v1(3275,1825) U8.5@3275,1975 ; v1(3525,1025) v1(3525,1825) ; v1(7375,1175) U5.5@7375,1275
BRD0: U30.3 U30.7 U39.12 | length 6095
  Top Layer w20: v1(1475,1675) 5125,1675 U30.3@5175,1725 5225,1675 5525,1675 U30.7@5575,1725
  Bottom Layer w20: v1(1475,1675) 1475,2775 1675,2775 1775,2875 1775,2925 1725,2975 1725,3225 1675,3275 U39.12@1675,3325
BRD1: U30.4 U31.3 U39.10 | length 6965.7
  Top Layer w20: v1(1575,1075) 1875,1075 1925,1025 2925,1025 2975,975 4875,975 4925,925 5125,925 U31.3@5175,975
  Bottom Layer w20: v1(1575,1075) 1575,2675 1775,2675 1775,2825 1825,2875 1825,3225 1875,3275 U39.10@1875,3325 ; U31.3@5175,975 5175,1025 5225,1075 5225,1475 5275,1525 U30.4@5275,1725
BRD2: U30.9 U31.4 U39.7 | length 8774.3
  Top Layer w20: v1(1775,475) v1(4925,475) ; v1(4875,2075) 5625,2075 U30.9@5675,2025 ; v1(4925,875) 5175,875 U31.4@5275,975
  Bottom Layer w20: v1(1775,475) 1675,475 1675,2575 1775,2575 1825,2625 1825,2775 1875,2825 U39.7@1875,3025 ; v1(4875,2075) 4875,925 v1(4925,875) v1(4925,475)
BS: U8.2 U8.6 U14.5 U40.9 | length 2224.3
  Top Layer w20: U8.2@2975,1975 3025,2025 3325,2025 U8.6@3375,1975 3425,2025 4225,2025 U14.5@4275,1975
  Bottom Layer w20: U14.5@4275,1975 4275,1825 4325,1775 4325,1275 4375,1225 U40.9@4375,1175
C\A\S\: U13.11 U21.15 U22.15 U23.15 U24.15 U25.15 U26.15 U27.15 U28.15 | length 10453.1
  Top Layer w20: v1(2825,1225) 3125,1225 U13.11@3175,1175 ; v1(2825,1775) 5875,1775 5925,1725 v1(6925,1725) ; v1(6075,3775) v1(7075,3775)
  Bottom Layer w20: v1(2825,1225) v1(2825,1775) ; U28.15@6073.81,3075 6075,3076.19 6075,3125 6025,3175 6025,3203.05 6024.28,3203.77 6024.28,3274.28 6075,3325 6075,3523.81 U26.15@6073.81,3525 6075,3526.19 6075,3575 6025,3625 6025,3653.05 6024.28,3653.77 6024.28,3724.28 v1(6075,3775) 6075,3973.81 U24.15@6073.81,3975 6073.81,4023.81 6125,4075 6125,4103.77 6124.28,4104.49 6124.28,4146.23 6125,4146.95 6125,4325 6073.81,4376.19 U22.15@6073.81,4425 ; v1(6925,1725) 6925,2175 7025,2275 7025,2475 7125,2575 7125,2753.77 7124.28,2754.49 7124.28,2796.23 7125,2796.95 7125,2975 7073.81,3026.19 U27.15@7073.81,3075 7075,3076.19 7075,3125 7025,3175 7025,3198.05 7024.28,3198.77 7024.28,3276.66 7073.81,3326.19 7073.81,3520 7075,3521.19 7075,3575 7025,3625 7025,3653.05 7024.28,3653.77 7024.28,3724.28 v1(7075,3775) 7075,3973.81 U23.15@7073.81,3975 7075,3976.19 7075,4025 7125,4075 7125,4103.05 7124.28,4103.77 7124.28,4145.52 7125,4146.23 7125,4325 7073.81,4376.19 U21.15@7073.81,4425
C\S\R\A\M\: U1.9 U12.6 U32.1 | length 3645
  Top Layer w20: v1(2475,2825) 3675,2825 3725,2875 3825,2875 3875,2925 v1(4025,2925) ; v1(4175,3175) 4725,3175 U32.1@4775,3125
  Bottom Layer w20: U1.9@2425,1725 U12.6@2425,1975 2425,2075 2475,2125 v1(2475,2825) ; v1(4025,2925) 4025,2975 4175,3125 v1(4175,3175)
D0: R2.2 U20.14 U21.2 U29.11 U32.12 U37.4 U39.13 U41.11 | length 8056.6
  Top Layer w20: v1(1575,3425) 1775,3425 1775,3475 2025,3475 2030,3470 2030,3456.36 2061.36,3425 U41.11@2125,3425 2225,3425 2275,3375 2775,3375 2825,3425 U29.11@2875,3425 2975,3425 3025,3375 v1(3975,3375) 4475,3375 4525,3425 4675,3425 4775,3525 5475,3525 U32.12@5575,3425 ; R2.2@3625,3125 U20.14@3775,3125 v1(4025,3125) ; v1(5625,4475) v1(7025,4475)
  Bottom Layer w20: U39.13@1575,3325 v1(1575,3425) U37.4@1575,3625 ; v1(3975,3375) 3975,3175 v1(4025,3125) ; U32.12@5575,3425 5575,3475 5625,3525 v1(5625,4475) ; v1(7025,4475) 7025,4446.95 7024.28,4446.23 7024.28,4225.72 7073.81,4176.19 U21.2@7073.81,4125
D1: R2.1@3625,3025 U20.15 U22.2 U29.12 U32.15 U37.7 U39.11 U41.12 | length 6619.6
  Top Layer w20: U39.11@1775,3325 1825,3375 2025,3375 2075,3325 U41.12@2125,3325 2225,3325 2275,3275 2775,3275 2825,3325 U29.12@2875,3325 2975,3325 3025,3275 v1(3925,3275) ; R2.1@3625,3025 U20.15@3775,3025 v1(3925,3025) 4325,3025 4325,2975 v1(4775,2975) ; v1(4825,3475) 5226.4,3475 5275,3426.4 U32.15@5275,3425 ; v1(5425,4225) 5475,4175 6025,4175 6073.81,4126.19 U22.2@6073.81,4125
  Bottom Layer w20: U39.11@1775,3325 1825,3375 1875,3375 U37.7@1875,3625 ; v1(3925,3025) v1(3925,3275) ; v1(4775,2975) 4825,3025 v1(4825,3475) ; U32.15@5275,3425 5425,3575 v1(5425,4225)
D2: R2.4 U20.12 U23.2 U29.13 U32.16 U37.9 U39.6 U41.13 | length 7012.5
  Top Layer w20: v1(1775,3225) v1(1925,3225) U41.13@2125,3225 2225,3225 2275,3175 2775,3175 2825,3225 U29.13@2875,3225 2975,3225 3025,3175 v1(3875,3175) 4075,3175 4175,3275 4575,3275 4625,3325 4975,3325 5025,3375 5125,3375 U32.16@5175,3425 ; R2.4@3625,3325 U20.12@3775,3325 ; U32.16@5182.57,3417.43 U32.16@5175,3425 ; v1(6925,3425) 5725,3425 5724.53,3424.53 5724.53,3404.49 5695.04,3375 5225,3375 5212.5,3387.5 U32.16@5175,3425 ; v2(6925,3625) 7025,3625 7073.81,3673.81 U23.2@7073.81,3675
  Bottom Layer w20: U39.6@1775,3025 v1(1775,3225) ; v1(1925,3225) 1925,3675 1975,3725 U37.9@1975,3925 ; U20.12@3775,3325 3875,3225 v1(3875,3175) ; v1(6925,3425) 6924.28,3425.72 6924.28,3541.23 6925,3541.95 v2(6925,3625)
D3: R2.8 U20.8 U24.2 U29.15 U32.19 U37.12 U39.4 U41.15 | length 6705.1
  Top Layer w20: v1(1625,3175) 2225,3175 2275,3125 U41.15@2725,3125 2775,3125 2825,3175 2975,3175 3025,3125 U29.15@3475,3125 ; R2.8@3625,3725 U20.8@3775,3725 4125,3725 4175,3675 v1(4525,3675) ; v1(4575,3375) 4825,3375 U32.19@4875,3425 ; v1(5375,3775) 5975,3775 6073.81,3676.19 U24.2@6073.81,3675
  Bottom Layer w20: U39.4@1575,3025 1575,3075 1625,3125 v1(1625,3175) 1625,3825 1675,3875 U37.12@1675,3925 ; U29.15@3475,3125 3325,3275 3325,3475 3425,3575 3525,3575 3575,3625 3575,3675 R2.8@3625,3725 ; v1(4525,3675) 4575,3625 v1(4575,3375) ; U32.19@4875,3425 4925,3475 5075,3475 5125,3525 5175,3525 5225,3575 5225,3675 5325,3775 v1(5375,3775)
D4: R2.9 U20.7 U25.2 U29.16 U32.2 U38.4 U39.3 U41.16 | length 8186.9
  Top Layer w20: v1(1525,3275) 2225,3275 2275,3225 U41.16@2725,3225 2775,3225 2825,3275 2975,3275 3025,3225 v1(3275,3225) U29.16@3475,3225 ; R2.9@3625,3825 U20.7@3775,3825 4118.93,3825 4168.93,3775 v1(4525,3775) ; v1(4675,3275) v1(4875,3275) 5679.89,3275 5729.89,3325 v1(7125,3325)
  Bottom Layer w20: U39.3@1475,3025 1475,3075 1525,3125 v1(1525,3275) 1525,4025 1575,4075 U38.4@1575,4125 ; v1(3275,3225) 3275,3475 3375,3575 3375,3625 3425,3675 3525,3675 3575,3725 3575,3775 R2.9@3625,3825 ; v1(4525,3775) 4625,3675 4625,3325 v1(4675,3275) ; U32.2@4875,3125 v1(4875,3275) ; U25.2@7073.81,3220 7075,3221.19 7075,3275 v1(7125,3325)
D5: R2.7 U20.9 U26.2 U29.17 U32.5 U38.7 U41.17 | length 5918.7
  Top Layer w20: v1(1825,3425) 2018.93,3425 2068.93,3375 2225,3375 2275,3325 U41.17@2725,3325 2775,3325 2825,3375 2975,3375 3025,3325 U29.17@3475,3325 ; R2.7@3625,3625 U20.9@3775,3625 4125,3625 4175,3575 v1(4525,3575) ; v1(4525,3225) v1(5175,3225) 5675,3225 5725,3275 6025,3275 6073.81,3226.19 U26.2@6073.81,3225
  Bottom Layer w20: v1(1825,3425) 1825,3675 1925,3775 1925,4025 1875,4075 U38.7@1875,4125 ; U29.17@3475,3325 3425,3375 3425,3475 3525,3475 3575,3525 3575,3575 R2.7@3625,3625 ; v1(4525,3225) v1(4525,3575) ; U32.5@5175,3125 v1(5175,3225)
D6: R2.6 U20.10 U27.2 U29.18 U32.6 U38.9 U41.18 | length 6948.6
  Top Layer w20: v1(2075,3475) 2225,3475 2275,3425 U41.18@2725,3425 2775,3425 2825,3475 2975,3475 3025,3425 U29.18@3475,3425 ; R2.6@3625,3525 U20.10@3775,3525 4125,3525 4175,3475 v1(4225,3475) ; v1(4225,3075) 5275,3075 ; U32.6@5275,3125 5275,3075 ; v2(6925,3175) 6164.56,3175 6140.38,3150.82 6125.82,3150.82 6100,3125 5745.04,3125 5695.04,3075 5275,3075
  Bottom Layer w20: U38.9@1975,4425 1975,4325 2075,4225 v1(2075,3475) ; U29.18@3475,3425 3525,3425 R2.6@3625,3525 ; v1(4225,3075) v1(4225,3475) ; v2(6925,3175) 6975,3125 7025,3125 7025,3096.23 7024.28,3095.52 7024.28,3053.77 7025,3053.05 7025,2825 7073.81,2776.19 U27.2@7073.81,2775
D7: R2.3 U20.13 U28.2 U29.19 U32.9 U38.12 U41.19 | length 6280.9
  Top Layer w20: v1(1725,4275) 2225,4275 2275,4225 v1(2600,4225) ; U41.19@2725,3525 2775,3525 2825,3575 2975,3575 3025,3525 U29.19@3475,3525 ; R2.3@3625,3225 U20.13@3775,3225 ; v1(3925,2825) 4031.07,2825 4081.07,2875 v1(5625,2875) 5825,2875 5875,2825 6025,2825 6073.81,2776.19 U28.2@6073.81,2775
  Bottom Layer w20: U38.12@1675,4425 1725,4375 v1(1725,4275) ; v1(2600,4225) 2600,3625 2700,3525 U41.19@2725,3525 ; U29.19@3475,3525 3425,3525 3375,3475 3375,3325 3425,3275 3525,3275 3575,3225 R2.3@3625,3225 ; U20.13@3775,3225 3825,3175 3825,2975 3925,2875 v1(3925,2825) ; U32.9@5575,3125 5575,3075 5625,3025 v1(5625,2875)
DV0: RDV0.1 U37.3 | length 700
  Top Layer w20: RDV0.1@1075,3425 v1(1475,3425)
  Bottom Layer w20: v1(1075,3325) RDV0.1@1075,3425 ; v1(1475,3425) U37.3@1475,3625
DV1: RDV1.1 U37.6 | length 1070.7
  Top Layer w20: RDV1.1@975,3425 975,3475 v1(1725,3475)
  Bottom Layer w20: v1(975,3325) RDV1.1@975,3425 ; v1(1725,3475) 1775,3525 U37.6@1775,3625
DV2: RDV2.1 U37.10 | length 1624.3
  Top Layer w20: RDV2.1@875,3425 925,3375 v1(1725,3375)
  Bottom Layer w20: v1(875,3325) RDV2.1@875,3425 ; v1(1725,3375) 1675,3425 1675,3525 1725,3575 1725,3675 1875,3825 U37.10@1875,3925
DV3: RDV3.1 U37.13 | length 2212.1
  Top Layer w20: v1(825,4275) 1175,4275 1225,4325 v1(1625,4325)
  Bottom Layer w20: v1(775,3325) RDV3.1@775,3425 775,3875 825,3925 v1(825,4275) ; U37.13@1575,3925 1575,3975 1625,4025 v1(1625,4325)
DV4: RDV4.1 U38.3 | length 1712.1
  Top Layer w20: v1(775,4175) 1175,4175 1225,4225 v1(1475,4225)
  Bottom Layer w20: v1(675,3325) RDV4.1@675,3425 675,3625 725,3675 725,3875 775,3925 v1(775,4175) ; U38.3@1475,4125 v1(1475,4225)
FLASH: D2.2 U7.11 | length 1763.6
  Top Layer w20: v1(2275,225) D2.2@3567.91,225
  Bottom Layer w20: v1(2275,225) 2275,425 2325,475 U7.11@2325,675
GND: C1_2.1 C5_1.1 D1_2.1 R3_2.1 R15.1 R19.1 R20.1 R21.1 R22.1 R32_2.1 T1.1 U1.7 U2.7 U3.8 U3.14 U4.8 U4.9 U4.10 U4.14 U4.15 U5.1 U5.8 U5.10 U5.14 U5.15 U6.1 U6.8 U6.9 U6.14 U6.15 U7.7 U7.8 U7.15 U8.7 U9.7 U10.7 U11.7 U12.7 U13.7 U14.7 U15.8 U16.8 U17.6 U17.8 U17.13 U18.8 U19.8 U19.10 U19.15 U20.29 U21.16 U22.16 U23.16 U24.16 U25.16 U26.16 U27.16 U28.16 U29.14 U30.8 U31.7 U31.8 U31.9 U32.10 U33.8 U33.15 U34.7 U35.6 U35.7 U36.8 U37.8 U38.8 U39.8 U40.7 U41.14 U41.20 | length 43912.7
  Top Layer w20: C5_1.1@1075,2925 R32_2.1@1175,2925 1225,2975 1425,2975 ; T1.1@1425,2825 1425,2975 ; v1(1975,425) 2375,425 U7.7@2425,375 2425,370 2670,370 v1(2675,375) ; U3.14@2025,1175 2075,1225 2175,1225 2275,1325 D1_2.1@2675,1325 ; U3.8@2525,875 v1(2675,875) ; U1.7@2525,1425 v1(2675,1425) ; U12.7@2525,1975 v1(2675,1975) ; U9.7@2525,2475 v1(2675,2475) ; U41.20@2725,3625 2775,3625 2825,3675 v1(2975,3675) ; U29.14@2875,3125 2825,3125 2775,3075 v1(2625,3075) 2275,3075 2225,3125 U41.14@2125,3125 2075,3125 U39.8@1975,3025 1925,2975 1425,2975 ; U34.7@3475,1425 v1(3675,1425) ; U8.7@3475,1975 v1(3675,1975) ; U10.7@3475,2475 v1(3575,2475) ; U11.7@4475,375 v1(4725,375) ; U40.7@4475,875 v1(4725,875) ; U2.7@4475,1425 v1(4725,1425) ; v1(4625,2825) 5025,2825 U33.15@5075,2775 ; U31.7@5575,975 U31.8@5675,975 v1(5825,975) ; U30.8@5675,1725 v1(5825,1725) ; U33.8@5675,2475 v1(5775,2475) ; U32.10@5675,3125 5725,3175 v1(5775,3175) ; U15.8@5675,3625 v1(5775,3625) ; U16.8@5675,4125 v1(5775,4125) ; v1(5775,3525) U26.16@5973.81,3525 ; v1(5775,3975) U24.16@5973.81,3975 ; v1(5775,4425) U22.16@5973.81,4425 ; v1(5825,2075) 5875,2025 v1(5975,2025) U6.15@6075,2125 U6.14@6175,2125 6225,2075 6625,2075 U6.9@6675,2125 ; U4.15@6075,1575 6075,1525 6175,1525 ; U4.14@6175,1575 6175,1525 ; v1(6225,2275) 6425,2275 U17.6@6475,2325 6525,2275 6625,2275 U17.8@6675,2325 v1(6875,2325) ; U4.10@6575,1575 6575,1525 ; U4.8@6675,1275 U5.1@6975,1275 ; U4.9@6675,1575 6675,1525 ; U6.8@6675,1825 v1(6875,1825) ; v1(6875,2175) 7025,2175 U19.15@7075,2125 7125,2175 7525,2175 U19.10@7575,2125 7625,2075 v1(7725,2075) ; v1(6875,3075) U27.16@6973.81,3075 ; v1(6875,3525) U25.16@6973.81,3525 ; U5.10@7575,1575 7525,1525 7225,1525 U5.14@7175,1575 U5.15@7075,1575 7025,1525 v1(6875,1525) 6675,1525 ; 6175,1525 6575,1525 ; 6575,1525 6675,1525